# Altium PCB HyperDrive.PcbDoc (part 2 of 2)
Units mm, origin at the board's own origin, x right, y up, seen from the top; angles counter-clockwise.
Board outline 100 x 100 mm, 8 copper layers (SU, GNDU, HSU, PWRU, PWRD, HSD, GNDD, SD), stack 0.757 mm thick; 201 components, 155 nets, 1129 pads, 0 vias.
Unrouted connection lines stored in the file: 714.
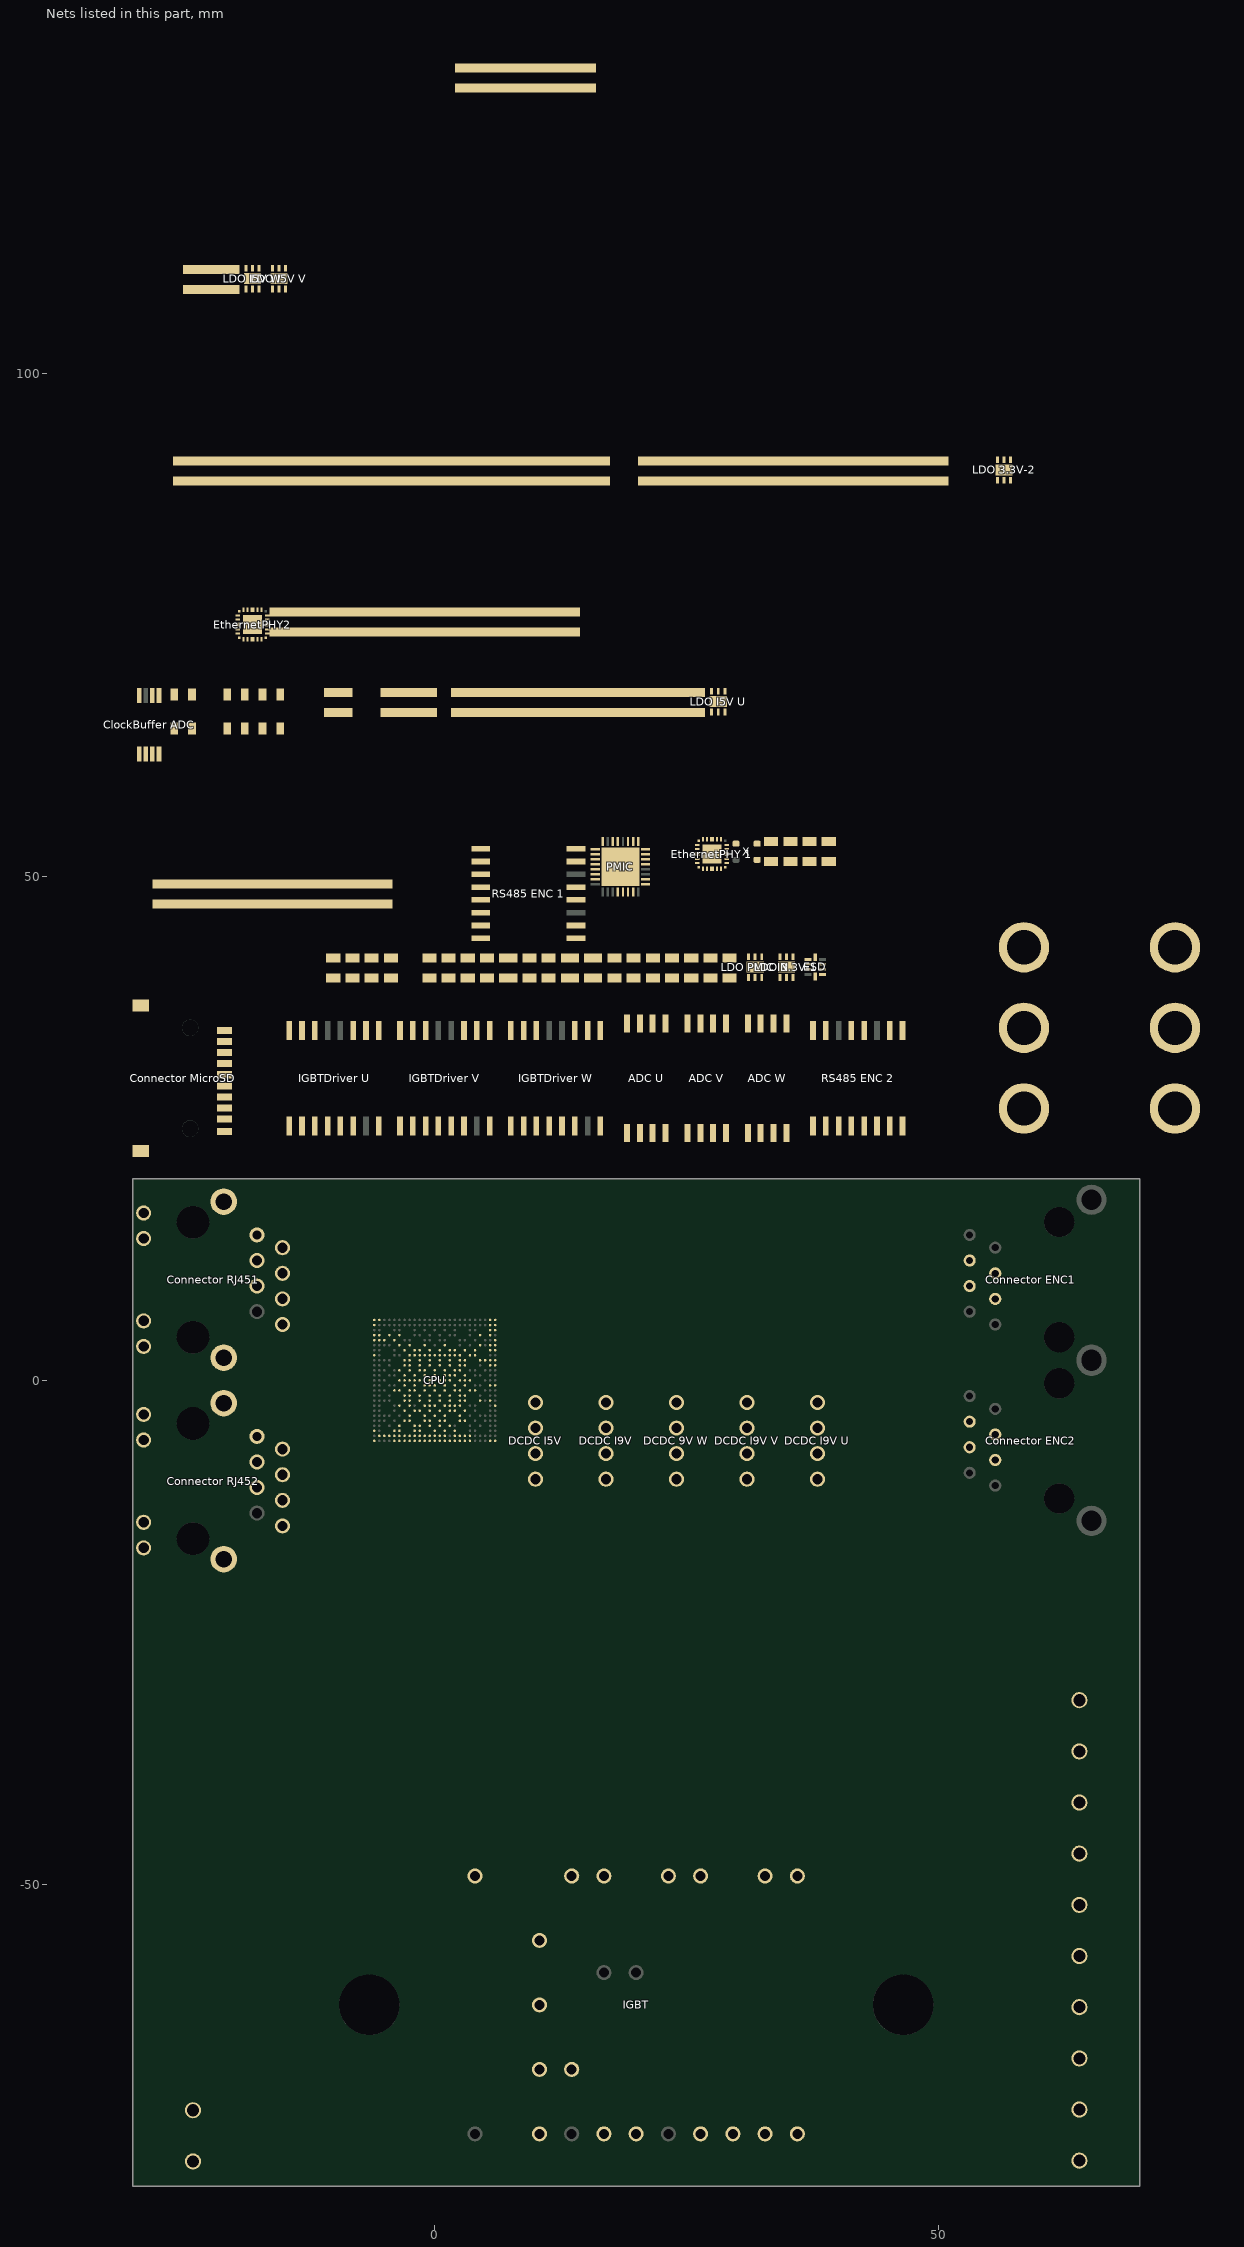
[diagram p2: the nets of this part, all layers, seen from the top]

## Part data
"ADC U" "ADC V" "ADC W": "Isolated Delta-Sigm", MANUFACTURER_NAME="Texas Instruments", MANUFACTURER_PART_NUMBER=AMC1306M05DWV, Copyright="Copyright (C) 2025 Ultra Librarian. All rights reserved.", Datasheet=https://www.ti.com/lit/gpn/amc1306m05, RefDes=RefDes, Type=TYPE
"C 1.8V Crystal" "C ADC U-1" "C ADC U-2" "C ADC U-3" "C ADC U-4" "C ADC V-1" "C ADC V-2" "C ADC V-3" "C ADC V-4" "C ADC W-1" "C ADC W-2" "C ADC W-3" "C ADC W-4" "C Backup-1" "C Backup-2" "C Backup-3" "C Backup-4" "C Backup-5" "C Backup-6" "C CAP_SOC MCU" "C CAP_SOC VDDS0" "C CAP_SOC VDDS1" "C CAP_SOC VDDS2" "C CAP_SOC VDDS3" "C CAP_SOC VDDS4" "C CAP_SOC VDDS5" "C CAP_SOC VDDS6" "C CAP_SOC VDDS_CANUART" "C ClockBuffer-1" "C ClockBuffer-2" "C DCDC I5V IN" "C DCDC I5V OUT" "C DCDC I9V IN" "C DCDC I9V OUT" "C DCDC I9V U IN" "C DCDC I9V V IN" "C DCDC I9V V OUT" "C DCDC I9V W IN" "C DCDC I9V W OUT" "C DCDCI 9V U OUT" "C Driver UH" "C Driver UL" "C Driver VH" "C Driver VL" "C Driver WH" "C Driver WL" "C DriverU-1" "C DriverU-2" "C DriverV-1" "C DriverV-2" "C DriverW-1" "C DriverW-2" "C ENC1 VCC1" "C ENC1 VCC2-1" "C ENC1 VCC2-2" "C ENC2 VCC1" "C ENC2 VCC2-1" "C ENC2 VCC2-2" "C EthernetPHY1-1" "C EthernetPHY1-2" "C EthernetPHY1-3" "C EthernetPHY2-1" "C EthernetPHY2-2" "C EthernetPHY2-3" "C LDO 3.3V-1 IN" "C LDO 3.3V-1 OUT" "C LDO 3.3V-2 IN" "C LDO 3.3V-2 OUT" "C LDO I9V U IN" "C LDO I9V U OUT" "C LDO I9V V IN" "C LDO I9V V OUT" "C LDO I9V W IN" "C LDO I9V W OUT" "C LDO PMIC IN" "C LDO PMIC OUT" "C MMC-1" "C MMC-2" "C PMIC 0.75V" "C PMIC 1.1V" "C PMIC 1.8V" "C PMIC 1.8V*" "C PMIC 2.5V" "C PMIC InternalBypass" "C PMIC SD_VDD" "C PMIC VIN B1" "C PMIC VIN B2" "C PMIC VIN B3" "C PMIC VIN LDO1" "C PMIC VIN LDO34" "C RJ451 RD1" "C RJ451 RD2" "C RJ451 TD1" "C RJ451 TD2" "C RJ452 RD1" "C RJ452 RD2" "C RJ452 TD1" "C RJ452 TD2": library part Capacitor, "Capacitor"
"ClockBuffer ADC": "Clock Buffer", Mfr_Name="Texas Instruments", RefDes=RefDes, Type=TYPE
"Connector 5V Main" "Connector AC UV" "Connector AC WN" "Connector HVDC" "Connector MOTOR UV" "Connector MOTOR WE": "Terminal Screw 5.08mm", Package=SCREWTERMINAL1X2, DeviceSetName=TERMINALBLOCK-1X2, GateName_1=G$1, LibraryName=TOTUDU, SymbolName_1=TERMINALBLOCK1X2
"Connector ENC1" "Connector ENC2": "8P8C Generic Robu.in RoboticsDNA", Package=RJ45-NOSHIELD, DeviceName=NOSHIELD, DeviceSetName=RJ45, GateName_1=JP1, LibraryName=TOTUDU, SymbolName_1=RJ45
"Connector MicroSD": "MicroSD Slot"
"Connector RJ451" "Connector RJ452": "RJ45 With Magnetics 10/100Mbps"
CPU: "Quad Core A53 512MB RAM"
"D GateOFF UH" "D GateOFF UL" "D GateOFF VH" "D GateOFF VL" "D GateOFF WH" "D GateOFF WL": library part Diode
ESD: library part "ESD TPD6E001RSFR", "ESD 6Channel", Mfr_Name="Texas Instruments", RefDes=RefDes, Type=Type
"EthernetPHY1 PWRDWN" "R DDR0_CAL0" "R DDR_RESET" "R DDRZQ" "R EthernetPHY1 LED Act" "R EthernetPHY1 LED Link" "R EthernetPHY2 LED Act" "R EthernetPHY2 LED Link" "R EthernetPHY2 PWRDN" "R GATE PullDown UH" "R GATE PullDown UL" "R GATE PullDown VH" "R GATE PullDown VL" "R GATE PullDown WH" "R GATE PullDown WL" "R GateOFF UH" "R GateOFF UL" "R GateOFF VH" "R GateOFF VL" "R GateOFF WH" "R GateOFF WL" "R GateON UH" "R GateON UL" "R GateON VH" "R GateON VL" "R GateON WH" "R GateON WL" "R MCU_PORZ" "R MCU_RESETZ" "R MMC PULLUP CLK" "R MMC PULLUP CMD" "R MMC PULLUP D0" "R MMC PULLUP D1" "R MMC PULLUP D2" "R MMC PULLUP D3" "R PMIC Enable Pullup" "R PORZ_OUT" "R RBIAS EthernetPHY1" "R RBIAS EthernetPHY2" "R RESET_REQZ" "R RESETSTATZ": library part Resistor, "Resistor"
EthernetPHY2 "EthernetPHY 1": "PHY 10/100 Mbps", MANUFACTURER_NAME="Texas Instruments", MANUFACTURER_PART_NUMBER=DP83825IRMQR, Copyright="Copyright (C) 2025 Ultra Librarian. All rights reserved.", Datasheet=https://www.ti.com/lit/gpn/dp83825i, RefDes=RefDes, Type=Type
"F ADC" "F Driver" "F ENC1 VCC1" "F ENC1 VCC2" "F ENC2 VCC1" "F ENC2 VCC2" "F EthernetPHY1" "F EthernetPHY?": library part Ferrite, "Ferrite"
IGBT: library part "IGBT FP30R06W1E3", "IGBT FP30R06W1E3"
"IGBTDriver U" "IGBTDriver V" "IGBTDriver W": library part "IGBTDriver UCC21550ADWR", "Isolated Half Bridge Driver", MANUFACTURER_NAME="Texas Instruments", MANUFACTURER_PART_NUMBER=UCC21550ADWR, Copyright="Copyright (C) 2025 Ultra Librarian. All rights reserved.", Datasheet=https://www.ti.com/lit/gpn/ucc21550, RefDes=RefDes, Type="Power Management"
"L PMIC Buck1" "L PMIC Buck2" "L PMIC Buck3": library part Inductor, "Inductor"
"LDO 3.3V-1" "LDO 3.3V-2" "LDO I5V U" "LDO I5V V" "LDO I5V W" "LDO PMIC IN": "LDO 1A", MANUFACTURER_NAME="Texas Instruments", MANUFACTURER_PART_NUMBER=TLV76701DRVR, Copyright="Copyright (C) 2025 Ultra Librarian. All rights reserved.", Datasheet=https://www.ti.com/lit/gpn/tlv767, RefDes=RefDes, Type=TYPE
"LED 12V": library part LED, "LED"
PMIC: library part "PMIC TPS6521901RHBR", "AM625 SIP PMIC", MANUFACTURER_NAME="Texas Instruments", Copyright="Copyright (C) 2025 Ultra Librarian. All rights reserved.", MANUFACTURER_PART_NUMBER=PTPS6521901RHBR, RefDes=RefDes, Type=TYPE
"RS485 ENC 1" "RS485 ENC 2": "RS485 Isolated TransReciever", MANUFACTURER_NAME="Texas Instruments", MANUFACTURER_PART_NUMBER=ISO3088DW, Copyright="Copyright (C) 2025 Ultra Librarian. All rights reserved.", Datasheet=https://www.ti.com/lit/gpn/iso3088, RefDes=RefDes, Type=Type
"Shunt U" "Shunt V" "Shunt W": "Resistor"
X: MANUFACTURER_NAME=ECS, MANUFACTURER_PART_NUMBER=ECS-2520MV-250-CN-TR, Mouser Part Number=520-2520MV-250-CN-T, Datasheet Link=https://www.arrow.com/en/products/ecs-2520mv-250-cn-tr/ecs-international, Geometry.Height=0.9mm, Mouser Price/Stock=https://www.mouser.co.uk/ProductDetail/ECS/ECS-2520MV-250-CN-TR?qs=fAHHVMwC%252BbiTva9uv8VI%2Fw%3D%3D

## Nets (pads, with @x,y where several pads share a name; then routed paths per layer and width w, separated by ;. In a path a pad name is that pad's centre, name@x,y a point inside that pad or via, vN(x,y) a via of type N, cw(c..) or ccw(c..) an arc to the next point about the centre after c; other vN are vias at no path point)
"0.75Vb Inductor": "L PMIC Buck1.1" PMIC.2 PMIC.3
0.85V: "C PMIC 0.75V.2" "L PMIC Buck1.2" CPU.F8 CPU.H8 CPU.J11 CPU.J12 CPU.J14 CPU.K16 CPU.K17 CPU.L12 CPU.L15 CPU.M16 CPU.N8 CPU.N11 CPU.N12 CPU.N13 CPU.N14 CPU.P16 CPU.P17 CPU.R11 CPU.R12 CPU.R14 CPU.T10 CPU.U12 CPU.U14 CPU.V8 CPU.V15 CPU.V17 CPU.W12 CPU.W13 PMIC.1
1.1V: "C PMIC 1.1V.2" "L PMIC Buck3.2" CPU.F2 CPU.G2 CPU.H1 CPU.H2 CPU.K9 CPU.L8 CPU.M9 CPU.N1 CPU.N2 CPU.P2 CPU.P9 CPU.R2 CPU.R8 CPU.U1 CPU.U2 CPU.V2 CPU.W2 PMIC.24
"1.1Vb Inductor": "L PMIC Buck3.1" PMIC.27
1.8V: "C PMIC 1.8V.2" "L PMIC Buck2.2" CPU.G10 PMIC.32
"1.8V ClockGenerator": "C 1.8V Crystal.2" "F 1.8V Crystal.2" X.4
1.8VA: "C PMIC 1.8V*.2" "F 1.8V Crystal.1" CPU.G7 CPU.G16 CPU.L11 CPU.L14 CPU.M4 CPU.N3 CPU.T9 CPU.U11 CPU.U15 CPU.W9 CPU.W10 CPU.W14 CPU.Y11 PMIC.21
"1.8Vb Inductor": "L PMIC Buck2.1" PMIC.29
2.5V: "C PMIC 2.5V.2" PMIC.23
3.3V: "EthernetPHY1 PWRDWN.1" "R EthernetPHY2 PWRDN.1" "R MCU_RESETZ.2" "R RESET_REQZ.2" CPU.F11 CPU.F15 CPU.G12 CPU.G14 CPU.H9 CPU.J18 CPU.K10 CPU.L18 CPU.M19 CPU.N18 CPU.P18 CPU.T7 CPU.T19 CPU.U18 CPU.W16 CPU.W19 CPU.Y13
"3.3V ENC1": "C ENC1 VCC1.1" "F ENC1 VCC1.2" "RS485 ENC 1.1"
"3.3V ENC2": "C ENC2 VCC1.1" "F ENC2 VCC1.2" "RS485 ENC 2.1"
"3.3V EthernetPHY1": "C EthernetPHY1-1.2" "C EthernetPHY1-2.1" "C EthernetPHY1-3.1" "EthernetPHY 1.6" "EthernetPHY 1.19" "F EthernetPHY1.2"
"3.3V EthernetPHY2": "C EthernetPHY2-1.1" "C EthernetPHY2-2.1" "C EthernetPHY2-3.1" "F EthernetPHY2.2" EthernetPHY2.6 EthernetPHY2.19
"3.3V MMC": "C MMC-1.2" "C MMC-2.2" "Connector MicroSD.4" "F EthernetPHY?.2"
3.3V-1: "C LDO 3.3V-1 OUT.2" "F EthernetPHY1.1" "F EthernetPHY2.1" "LDO 3.3V-1.1" "LDO 3.3V-1.2"
3.3V-2: "C LDO 3.3V-2 OUT.2" "F ADC.1" "F Driver.1" "F ENC1 VCC1.1" "F ENC2 VCC1.1" "F EthernetPHY?.1" "LDO 3.3V-2.1" "LDO 3.3V-2.2"
"3.3V-2 ADC": "ADC U.8" "ADC V.8" "ADC W.8" "C ADC U-1.1" "C ADC U-2.1" "C ADC V-1.1" "C ADC V-2.1" "C ADC W-1.1" "C ADC W-2.1" "C ClockBuffer-1.2" "C ClockBuffer-2.2" "ClockBuffer ADC.2" "ClockBuffer ADC.6" "F ADC.2"
"3.3V-2 Driver": "C DriverU-1.2" "C DriverU-2.2" "C DriverV-1.2" "C DriverV-2.2" "C DriverW-1.2" "C DriverW-2.2" "F Driver.2" "IGBTDriver U.3" "IGBTDriver U.8" "IGBTDriver V.3" "IGBTDriver V.8" "IGBTDriver W.3" "IGBTDriver W.8"
5V: "C Backup-1.2" "C Backup-2.2" "C Backup-3.2" "C Backup-4.2" "C Backup-5.2" "C Backup-6.2" "C DCDC I5V IN.2" "C DCDC I9V IN.2" "C DCDC I9V U IN.2" "C DCDC I9V V IN.2" "C DCDC I9V W IN.2" "C LDO 3.3V-1 IN.2" "C LDO 3.3V-2 IN.2" "C LDO PMIC IN.2" "C PMIC VIN B1.2" "C PMIC VIN B2.2" "C PMIC VIN B3.2" "Connector 5V Main.1" "DCDC 9V W.VIN+" "DCDC I5V.VIN+" "DCDC I9V U.VIN+" "DCDC I9V V.VIN+" "DCDC I9V.VIN+" "LDO 3.3V-1.6" "LDO 3.3V-2.6" "LDO PMIC IN.4" "LDO PMIC IN.6" "LED 12V.1" "R PMIC Enable Pullup.2" PMIC.4 PMIC.5 PMIC.13 PMIC.26 PMIC.30
25Mhz: CPU.B2 X.3
50Mhz: "EthernetPHY 1.13" CPU.A18 CPU.AD17 CPU.AD23 EthernetPHY2.13
"AC U": "Connector AC UV.1" IGBT.L1
"AC V": "Connector AC UV.2" IGBT.L2
"AC W": "Connector AC WN.1" IGBT.L3
"CAP_SOC CANUART": "C CAP_SOC VDDS_CANUART.1" CPU.G9
"CAP_SOC MCU": "C CAP_SOC MCU.1" CPU.H11
"CAP_SOC VDDS0": "C CAP_SOC VDDS0.1" CPU.H15
"CAP_SOC VDDS1": "C CAP_SOC VDDS1.1" CPU.K18
"CAP_SOC VDDS2": "C CAP_SOC VDDS2.1" CPU.W17
"CAP_SOC VDDS3": "C CAP_SOC VDDS3.1" CPU.P19
"CAP_SOC VDDS4": "C CAP_SOC VDDS4.1" CPU.U7
"CAP_SOC VDDS5": "C CAP_SOC VDDS5.1" CPU.H17
"CAP_SOC VDDS6": "C CAP_SOC VDDS6.1" CPU.J19
CardDetect: "Connector MicroSD.9"
DDR0_CAL: "R DDR0_CAL0.1" CPU.M2
DDR0_RESETN: "R DDR_RESET.1" CPU.G1
DDR_ZQ: "R DDRZQ.1" CPU.R3
"DeltaSigma Clock Input": "ClockBuffer ADC.1"
"DeltaSigma Clock U": "ADC U.7" "ClockBuffer ADC.3"
"DeltaSigma Clock V": "ADC V.7" "ClockBuffer ADC.8"
"DeltaSigma Clock W": "ADC W.7" "ClockBuffer ADC.5"
"DeltaSigma Data U": "ADC U.6"
"DeltaSigma Data V": "ADC V.6"
"DeltaSigma Data W": "ADC W.6"
"Drive Enable": "IGBTDriver U.5" "IGBTDriver V.5" "IGBTDriver W.5"
EARTH: "Connector AC WN.2" "Connector MOTOR WE.2" "Connector RJ451.8" "Connector RJ451.SH" "Connector RJ452.8" "Connector RJ452.SH"
"ENC1 A": "Connector ENC1.5" "RS485 ENC 1.13"
"ENC1 B": "Connector ENC1.4" "RS485 ENC 1.12"
"ENC1 FL": "RS485 ENC 1.4" "RS485 ENC 1.5"
"ENC1 RX": "RS485 ENC 1.3"
"ENC1 TX": "RS485 ENC 1.6"
"ENC2 A": "Connector ENC2.5" "RS485 ENC 2.13"
"ENC2 B": "Connector ENC2.4" "RS485 ENC 2.12"
"ENC2 FL": "RS485 ENC 2.4" "RS485 ENC 2.5"
"ENC2 RX": "RS485 ENC 2.3"
"ENC2 TX": "RS485 ENC 2.6"
"Ethernet1 RD+": "Connector RJ451.3" "EthernetPHY 1.8"
"Ethernet1 RD-": "Connector RJ451.6" "EthernetPHY 1.7"
"Ethernet1 TD+": "Connector RJ451.1" "EthernetPHY 1.11"
"Ethernet1 TD-": "Connector RJ451.2" "EthernetPHY 1.10"
"Ethernet2 RD+": "Connector RJ452.3" EthernetPHY2.8
"Ethernet2 RD-": "Connector RJ452.6" EthernetPHY2.7
"Ethernet2 TD+": "Connector RJ452.1" EthernetPHY2.11
"Ethernet2 TD-": "Connector RJ452.2" EthernetPHY2.10
"EthernetPHY1 LED Act": "EthernetPHY 1.4" "R EthernetPHY1 LED Act.2"
"EthernetPHY1 LED Link": "EthernetPHY 1.2" "R EthernetPHY1 LED Link.2"
"EthernetPHY1 PWRDN": "EthernetPHY1 PWRDWN.2" "EthernetPHY 1.3"
"EthernetPHY1 RBIAS": "EthernetPHY 1.14" "R RBIAS EthernetPHY1.1"
"EthernetPHY2 LED Act": "R EthernetPHY2 LED Act.2" EthernetPHY2.4
"EthernetPHY2 LED Link": "R EthernetPHY2 LED Link.2" EthernetPHY2.2
"EthernetPHY2 PWRDN": "R EthernetPHY2 PWRDN.2" EthernetPHY2.3
"EthernetPHY2 RBIAS": "R RBIAS EthernetPHY2.1" EthernetPHY2.14
"Gate UH": "IGBTDriver U.15" "R GateOFF UH.2" "R GateON UH.2"
"Gate UL": "IGBTDriver U.10" "R GateOFF UL.2" "R GateON UL.2"
"Gate VH": "IGBTDriver V.15" "R GateOFF VH.2" "R GateON VH.2"
"Gate VL": "IGBTDriver V.10" "R GateOFF VL.2" "R GateON VL.2"
"Gate WH": "IGBTDriver W.15" "R GateOFF WH.2" "R GateON WH.2"
"Gate WL": "IGBTDriver W.10" "R GateOFF WL.2" "R GateON WL.2"
"GateOFF UH": "D GateOFF UH.1" "R GateOFF UH.1"
"GateOFF UL": "D GateOFF UL.1" "R GateOFF UL.1"
"GateOFF VH": "D GateOFF VH.1" "R GateOFF VH.1"
"GateOFF VL": "D GateOFF VL.1" "R GateOFF VL.1"
"GateOFF WH": "D GateOFF WH.1" "R GateOFF WH.1"
"GateOFF WL": "D GateOFF WL.1" "R GateOFF WL.1"
GND: "ADC U.5" "ADC V.5" "ADC W.5" "C 1.8V Crystal.1" "C ADC U-1.2" "C ADC U-2.2" "C ADC V-1.2" "C ADC V-2.2" "C ADC W-1.2" "C ADC W-2.2" "C Backup-1.1" "C Backup-2.1" "C Backup-3.1" "C Backup-4.1" "C Backup-5.1" "C Backup-6.1" "C CAP_SOC MCU.2" "C CAP_SOC VDDS0.2" "C CAP_SOC VDDS1.2" "C CAP_SOC VDDS2.2" "C CAP_SOC VDDS3.2" "C CAP_SOC VDDS4.2" "C CAP_SOC VDDS5.2" "C CAP_SOC VDDS6.2" "C CAP_SOC VDDS_CANUART.2" "C ClockBuffer-1.1" "C ClockBuffer-2.1" "C DCDC I5V IN.1" "C DCDC I9V IN.1" "C DCDC I9V U IN.1" "C DCDC I9V V IN.1" "C DCDC I9V W IN.1" "C DriverU-1.1" "C DriverU-2.1" "C DriverV-1.1" "C DriverV-2.1" "C DriverW-1.1" "C DriverW-2.1" "C ENC1 VCC1.2" "C ENC2 VCC1.2" "C EthernetPHY1-1.1" "C EthernetPHY1-2.2" "C EthernetPHY1-3.2" "C EthernetPHY2-1.2" "C EthernetPHY2-2.2" "C EthernetPHY2-3.2" "C LDO 3.3V-1 IN.1" "C LDO 3.3V-1 OUT.1" "C LDO 3.3V-2 IN.1" "C LDO 3.3V-2 OUT.1" "C LDO PMIC IN.1" "C LDO PMIC OUT.1" "C MMC-1.1" "C MMC-2.1" "C PMIC 0.75V.1" "C PMIC 1.1V.1" "C PMIC 1.8V*.1" "C PMIC 1.8V.1" "C PMIC 2.5V.1" "C PMIC InternalBypass.1" "C PMIC SD_VDD.1" "C PMIC VIN B1.1" "C PMIC VIN B2.1" "C PMIC VIN B3.1" "C PMIC VIN LDO1.1" "C PMIC VIN LDO34.1" "C RJ451 RD1.1" "C RJ451 RD2.1" "C RJ451 TD1.1" "C RJ451 TD2.1" "C RJ452 RD1.1" "C RJ452 RD2.1" "C RJ452 TD1.1" "C RJ452 TD2.1" "ClockBuffer ADC.4" "Connector 5V Main.2" "Connector MicroSD.6" "Connector MicroSD.10" "Connector MicroSD.SH" "Connector RJ451.10" "Connector RJ451.11" "Connector RJ452.10" "Connector RJ452.11" "DCDC 9V W.VIN-" "DCDC I5V.VIN-" "DCDC I9V U.VIN-" "DCDC I9V V.VIN-" "DCDC I9V.VIN-" "EthernetPHY 1.9" "EthernetPHY 1.21" "EthernetPHY 1.25" "IGBTDriver U.4" "IGBTDriver U.6" "IGBTDriver V.4" "IGBTDriver V.6" "IGBTDriver W.4" "IGBTDriver W.6" "LDO 3.3V-1.3" "LDO 3.3V-1.5" "LDO 3.3V-1.7" "LDO 3.3V-2.3" "LDO 3.3V-2.5" "LDO 3.3V-2.7" "LDO PMIC IN.3" "LDO PMIC IN.5" "LDO PMIC IN.7" "R 12V LED.1" "R DDR0_CAL0.2" "R DDR_RESET.2" "R DDRZQ.2" "R MCU_PORZ.2" "R PORZ_OUT.2" "R RBIAS EthernetPHY1.2" "R RBIAS EthernetPHY2.2" "R RESETSTATZ.2" "RS485 ENC 1.2" "RS485 ENC 1.7" "RS485 ENC 1.8" "RS485 ENC 2.2" "RS485 ENC 2.7" "RS485 ENC 2.8" CPU.A1 CPU.A3 CPU.A24 CPU.A25 CPU.AA11 CPU.AB9 CPU.AD1 CPU.AD9 CPU.AD12 CPU.AD16 CPU.AD25 CPU.AE1 CPU.AE8 CPU.AE12 CPU.AE16 CPU.AE24 CPU.AE25 CPU.B25 CPU.C2 CPU.E1 CPU.E2 CPU.E3 CPU.F1 CPU.F3 CPU.F4 CPU.F13 CPU.G5 CPU.G13 CPU.G19 CPU.H5 CPU.H6 CPU.H10 CPU.H13 CPU.H16 CPU.H18 CPU.H20 CPU.J1 CPU.J2 CPU.J3 CPU.J4 CPU.J7 CPU.J13 CPU.K1 CPU.K2 CPU.K3 CPU.K4 CPU.K7 CPU.K13 CPU.K15 CPU.K19 CPU.L1 CPU.L2 CPU.L5 CPU.L6 CPU.L20 CPU.M1 CPU.M5 CPU.M7 CPU.M8 CPU.M10 CPU.M12 CPU.M13 CPU.M17 CPU.M18 CPU.N6 CPU.N15 CPU.P1 CPU.P4 CPU.P5 CPU.P7 CPU.P10 CPU.P13 CPU.R1 CPU.R5 CPU.R6 CPU.R13 CPU.R15 CPU.R18 CPU.R20 CPU.T1 CPU.T4 CPU.T8 CPU.T13 CPU.T14 CPU.T16 CPU.T17 CPU.T18 CPU.U3 CPU.U8 CPU.U19 CPU.V1 CPU.V5 CPU.V6 CPU.V9 CPU.V10 CPU.V11 CPU.V13 CPU.V16 CPU.V18 CPU.W1 CPU.W5 CPU.W7 CPU.Y1 CPU.Y2 ESD.GND EthernetPHY2.9 EthernetPHY2.21 EthernetPHY2.25 PMIC.15 PMIC.33 X.2
HVDC: "Connector HVDC.1" IGBT.P IGBT.P1
I5V: "C DCDC I5V OUT.2" "DCDC I5V.VOUT+" "F ENC1 VCC2.1" "F ENC2 VCC2.1"
"I5V ENC1": "C ENC1 VCC2-1.1" "C ENC1 VCC2-2.1" "Connector ENC1.3" "F ENC1 VCC2.2" "RS485 ENC 1.16"
"I5V ENC2": "C ENC2 VCC2-1.2" "C ENC2 VCC2-2.2" "Connector ENC2.3" "F ENC2 VCC2.2" "RS485 ENC 2.16"
"I5V U": "ADC U.1" "C ADC U-3.2" "C ADC U-4.2" "C LDO I9V U OUT.2" "LDO I5V U.1" "LDO I5V U.2"
"I5V V": "ADC V.1" "C ADC V-3.2" "C ADC V-4.2" "C LDO I9V V OUT.2" "LDO I5V V.1" "LDO I5V V.2"
"I5V W": "ADC W.1" "C ADC W-3.2" "C ADC W-4.2" "C LDO I9V W OUT.2" "LDO I5V W.1" "LDO I5V W.2"
I9V: "C DCDC I9V OUT.2" "C Driver UL.2" "C Driver VL.2" "C Driver WL.2" "DCDC I9V.VOUT+" "IGBTDriver U.11" "IGBTDriver V.11" "IGBTDriver W.11"
"I9V U": "C DCDCI 9V U OUT.2" "C Driver UH.1" "C LDO I9V U IN.2" "C LDO I9V V IN.2" "C LDO I9V W IN.2" "DCDC I9V U.VOUT+" "IGBTDriver U.16" "LDO I5V U.4" "LDO I5V U.6" "LDO I5V V.4" "LDO I5V V.6" "LDO I5V W.4" "LDO I5V W.6"
"I9V V": "C DCDC I9V V OUT.2" "C Driver VH.1" "DCDC I9V V.VOUT+" "IGBTDriver V.16"
"I9V W": "C DCDC I9V W OUT.2" "C Driver WH.1" "DCDC 9V W.VOUT+" "IGBTDriver W.16"
"IGBT Motor U": "ADC U.2" "C Driver UH.2" "IGBTDriver U.14" "R GATE PullDown UH.2" "Shunt U.1" IGBT.U
"IGBT Motor V": "ADC V.2" "C Driver VH.2" "IGBTDriver V.14" "R GATE PullDown VH.2" "Shunt V.1" IGBT.V
"IGBT Motor W": "ADC W.2" "C Driver WH.2" "IGBTDriver W.14" "R GATE PullDown WH.2" "Shunt W.1" IGBT.W
"IGBT UH": "IGBTDriver U.1"
"IGBT UL": "IGBTDriver U.2"
"IGBT VH": "IGBTDriver V.1"
"IGBT VL": "IGBTDriver V.2"
"IGBT WH": "IGBTDriver W.1"
"IGBT WL": "IGBTDriver W.2"
IGND: "C DCDC I5V OUT.1" "C DCDC I9V OUT.1" "C Driver UL.1" "C Driver VL.1" "C Driver WL.1" "C ENC1 VCC2-1.2" "C ENC1 VCC2-2.2" "C ENC2 VCC2-1.1" "C ENC2 VCC2-2.1" "Connector ENC1.6" "Connector ENC2.6" "Connector HVDC.2" "DCDC I5V.VOUT-" "DCDC I9V.VOUT-" "IGBTDriver U.9" "IGBTDriver V.9" "IGBTDriver W.9" "R GATE PullDown UL.2" "R GATE PullDown VL.2" "R GATE PullDown WL.2" "RS485 ENC 1.9" "RS485 ENC 1.10" "RS485 ENC 1.15" "RS485 ENC 2.9" "RS485 ENC 2.10" "RS485 ENC 2.15" IGBT.EU IGBT.EV IGBT.N IGBT.NB
"LED 5V": "LED 12V.2" "R 12V LED.2"
MCU_RESETZ: "R MCU_RESETZ.1" CPU.E11
MDC: "EthernetPHY 1.16" CPU.AD24 EthernetPHY2.16
MDIO: "EthernetPHY 1.15" CPU.AB22 EthernetPHY2.15
MMC_CLK: "Connector MicroSD.3" "R MMC PULLUP CMD.2" CPU.B22 ESD.1
MMC_CMD: "Connector MicroSD.5" "R MMC PULLUP CLK.2" CPU.A21 ESD.2
MMC_D0: "Connector MicroSD.7" "R MMC PULLUP D0.2" CPU.A22 ESD.3
MMC_D1: "Connector MicroSD.8" "R MMC PULLUP D1.2" CPU.B21 ESD.4
MMC_D2: "Connector MicroSD.1" "R MMC PULLUP D2.2" CPU.C21 ESD.5
MMC_D3: "Connector MicroSD.2" "R MMC PULLUP D3.2" CPU.D22 ESD.6
"Motor U": "ADC U.3" "ADC U.4" "C ADC U-3.1" "C ADC U-4.1" "C DCDCI 9V U OUT.1" "C LDO I9V U IN.1" "C LDO I9V U OUT.1" "Connector MOTOR UV.1" "DCDC I9V U.VOUT-" "LDO I5V U.3" "LDO I5V U.5" "LDO I5V U.7" "Shunt U.2"
"Motor V": "ADC V.3" "ADC V.4" "C ADC V-3.1" "C ADC V-4.1" "C DCDC I9V V OUT.1" "C LDO I9V V IN.1" "C LDO I9V V OUT.1" "Connector MOTOR UV.2" "DCDC I9V V.VOUT-" "LDO I5V V.3" "LDO I5V V.5" "LDO I5V V.7" "Shunt V.2"
"Motor W": "ADC W.3" "ADC W.4" "C ADC W-3.1" "C ADC W-4.1" "C DCDC I9V W OUT.1" "C LDO I9V W IN.1" "C LDO I9V W OUT.1" "Connector MOTOR WE.1" "DCDC 9V W.VOUT-" "LDO I5V W.3" "LDO I5V W.5" "LDO I5V W.7" "Shunt W.2"
"NetC RJ451 RD1_2": "C RJ451 RD1.2" "C RJ451 RD2.2" "Connector RJ451.5"
"NetC RJ451 TD1_2": "C RJ451 TD1.2" "C RJ451 TD2.2" "Connector RJ451.4"
"NetC RJ452 RD1_2": "C RJ452 RD1.2" "C RJ452 RD2.2" "Connector RJ452.5"
"NetC RJ452 TD1_2": "C RJ452 TD1.2" "C RJ452 TD2.2" "Connector RJ452.4"
"PMIC 3.3V Enable": "LDO 3.3V-1.4" "LDO 3.3V-2.4" PMIC.17
"PMIC 3.3V PVIN_LDO": "C LDO PMIC OUT.2" "C PMIC VIN LDO1.2" "C PMIC VIN LDO34.2" "LDO PMIC IN.1" "LDO PMIC IN.2" PMIC.6 PMIC.22
"PMIC Enable": "R PMIC Enable Pullup.1" PMIC.25
"PMIC Good": "EthernetPHY 1.5" "R MCU_PORZ.1" CPU.D2 EthernetPHY2.5 PMIC.18
"PMIC SD VSEL": PMIC.12
"PMIC VDD1P8": "C PMIC InternalBypass.2" PMIC.14
PORZ_OUT: "R PORZ_OUT.1" CPU.E21
RESETSTATZ: "R RESETSTATZ.1" CPU.F22
"RJ451 LED_G+": "Connector RJ451.9" "R EthernetPHY1 LED Link.1"
"RJ451 LED_Y+": "Connector RJ451.12" "Connector RJ452.12" "R EthernetPHY1 LED Act.1" "R EthernetPHY2 LED Act.1"
"RJ452 LED_G+": "Connector RJ452.9" "R EthernetPHY2 LED Link.1"
"RMII1 CRS_DV": "EthernetPHY 1.20" CPU.AE19
"RMII1 RX_D0": "EthernetPHY 1.18" CPU.AB17
"RMII1 RX_D1": "EthernetPHY 1.17" "EthernetPHY 1.24" CPU.AC17 CPU.AD20
"RMII1 RX_ER": "EthernetPHY 1.22" CPU.AE17
"RMII1 TX_D0": "EthernetPHY 1.23" CPU.AE20
"RMII1 TX_EN": "EthernetPHY 1.1" CPU.AD19
"RMII2 CRS_DV": CPU.AE21 EthernetPHY2.20
"RMII2 RX_D0": CPU.AE23 EthernetPHY2.18
"RMII2 RX_D1": CPU.AA18 CPU.AB20 EthernetPHY2.17 EthernetPHY2.24
"RMII2 RX_ER": CPU.AD22 EthernetPHY2.22
"RMII2 TX_D0": CPU.Y18 EthernetPHY2.23
"RMII2 TX_EN": CPU.AA19 EthernetPHY2.1
"SD VDD": "C PMIC SD_VDD.2" "R MMC PULLUP CLK.1" "R MMC PULLUP CMD.1" "R MMC PULLUP D0.1" "R MMC PULLUP D1.1" "R MMC PULLUP D2.1" "R MMC PULLUP D3.1" CPU.G17 ESD.VCC PMIC.7
UH: "D GateOFF UH.2" "R GATE PullDown UH.1" "R GateON UH.1" IGBT.G1
UL: "D GateOFF UL.2" "R GATE PullDown UL.1" "R GateON UL.1" IGBT.G2
VH: "D GateOFF VH.2" "R GATE PullDown VH.1" "R GateON VH.1" IGBT.G3
VL: "D GateOFF VL.2" "R GATE PullDown VL.1" "R GateON VL.1" IGBT.G4
"Warm Reset": "R RESET_REQZ.1" CPU.F20
WH: "D GateOFF WH.2" "R GATE PullDown WH.1" "R GateON WH.1" IGBT.G5
WL: "D GateOFF WL.2" "R GATE PullDown WL.1" "R GateON WL.1" IGBT.G6
pads on no net: "ClockBuffer ADC.7" "Connector ENC1.1" "Connector ENC1.2" "Connector ENC1.7" "Connector ENC1.8" "Connector ENC1.MH1" "Connector ENC1.MH2" "Connector ENC1.SHIELDL" "Connector ENC1.SHIELDR" "Connector ENC2.1" "Connector ENC2.2" "Connector ENC2.7" "Connector ENC2.8" "Connector ENC2.MH1" "Connector ENC2.MH2" "Connector ENC2.SHIELDL" "Connector ENC2.SHIELDR" "Connector MicroSD." "Connector RJ451.7" "Connector RJ451." "Connector RJ452.7" "Connector RJ452." "EthernetPHY 1.12" "IGBTDriver U.7" "IGBTDriver U.12" "IGBTDriver U.13" "IGBTDriver V.7" "IGBTDriver V.12" "IGBTDriver V.13" "IGBTDriver W.7" "IGBTDriver W.12" "IGBTDriver W.13" "RS485 ENC 1.11" "RS485 ENC 1.14" "RS485 ENC 2.11" "RS485 ENC 2.14" CPU.A2 CPU.A4 CPU.A5 CPU.A6 CPU.A7 CPU.A8 CPU.A9 CPU.A10 CPU.A11 CPU.A12 CPU.A13 CPU.A14 CPU.A15 CPU.A16 CPU.A17 CPU.A19 CPU.A20 CPU.A23 CPU.AA1 CPU.AA2 CPU.AA3 CPU.AA5 CPU.AA7 CPU.AA8 CPU.AA12 CPU.AA14 CPU.AA15 CPU.AA21 CPU.AA23 CPU.AA24 CPU.AA25 CPU.AB1 CPU.AB2 CPU.AB4 CPU.AB6 CPU.AB10 CPU.AB12 CPU.AB14 CPU.AB16 CPU.AB24 CPU.AB25 CPU.AC1 CPU.AC2 CPU.AC5 CPU.AC6 CPU.AC9 CPU.AC11 CPU.AC13 CPU.AC15 CPU.AC20 CPU.AC21 CPU.AC24 CPU.AC25 CPU.AD2 CPU.AD3 CPU.AD4 CPU.AD5 CPU.AD6 CPU.AD7 CPU.AD8 CPU.AD10 CPU.AD11 CPU.AD13 CPU.AD14 CPU.AD15 CPU.AD18 CPU.AD21 CPU.AE2 CPU.AE3 CPU.AE4 CPU.AE5 CPU.AE6 CPU.AE7 CPU.AE9 CPU.AE10 CPU.AE11 CPU.AE13 CPU.AE14 CPU.AE15 CPU.AE18 CPU.AE22 CPU.B1 CPU.B3 CPU.B4 CPU.B5 CPU.B6 CPU.B7 CPU.B8 CPU.B9 CPU.B10 CPU.B11 CPU.B12 CPU.B13 CPU.B14 CPU.B15 CPU.B16 CPU.B17 CPU.B18 CPU.B19 CPU.B20 CPU.B23 CPU.B24 CPU.C1 CPU.C5 CPU.C6 CPU.C9 CPU.C11 CPU.C13 CPU.C15 CPU.C17 CPU.C20 CPU.C24 CPU.C25 CPU.D1 CPU.D4 CPU.D6 CPU.D9 CPU.D10 CPU.D12 CPU.D14 CPU.D16 CPU.D17 CPU.D20 CPU.D24 CPU.D25 CPU.E5 CPU.E7 CPU.E8 CPU.E12 CPU.E14 CPU.E15 CPU.E18 CPU.E19 CPU.E23 CPU.E24 CPU.E25 CPU.F6 CPU.F18 CPU.F23 CPU.F24 CPU.F25 CPU.G21 CPU.G24 CPU.G25 CPU.H21 CPU.H24 CPU.H25 CPU.J8 CPU.J22 CPU.J23 CPU.J24 CPU.J25 CPU.K22 CPU.K24 CPU.K25 CPU.L21 CPU.L23 CPU.L24 CPU.L25 CPU.M21 CPU.M22 CPU.M24 CPU.M25 CPU.N20 CPU.N23 CPU.N24 CPU.N25 CPU.P21 CPU.P22 CPU.P24 CPU.P25 CPU.R21 CPU.R23 CPU.R24 CPU.R25 CPU.T2 CPU.T22 CPU.T24 CPU.T25 CPU.U4 CPU.U22 CPU.U23 CPU.U24 CPU.U25 CPU.V20 CPU.V21 CPU.V24 CPU.V25 CPU.W21 CPU.W24 CPU.W25 CPU.Y3 CPU.Y4 CPU.Y6 CPU.Y8 CPU.Y15 CPU.Y20 CPU.Y22 CPU.Y23 CPU.Y24 CPU.Y25 ESD. EthernetPHY2.12 IGBT. IGBT.B IGBT.EW IGBT.GB IGBT.T1 IGBT.T2 PMIC.8 PMIC.9 PMIC.10 PMIC.11 PMIC.16 PMIC.19 PMIC.20 PMIC.28 PMIC.31 X.1

## Text inside footprints (layer, text, board x,y; h text height)
"C 1.8V Crystal": Top Overlay "C" at -3.852,40.602 h1 r90
"C ADC U-1": Top Overlay "C" at 1.8,89.963 h1 r90
"C ADC U-2": Top Overlay "C" at 3.2,89.963 h1 r90
"C ADC U-3": Top Overlay "C" at 4.6,89.963 h1 r90
"C ADC U-4": Top Overlay "C" at 0.4,89.963 h1 r90
"C ADC V-1": Top Overlay "C" at -3.8,89.963 h1 r90
"C ADC V-2": Top Overlay "C" at -2.4,89.963 h1 r90
"C ADC V-3": Top Overlay "C" at -1,89.963 h1 r90
"C ADC V-4": Top Overlay "C" at 11.6,89.963 h1 r90
"C ADC W-1": Top Overlay "C" at 13,89.963 h1 r90
"C ADC W-2": Top Overlay "C" at 14.4,89.963 h1 r90
"C ADC W-3": Top Overlay "C" at 10.2,89.963 h1 r90
"C ADC W-4": Top Overlay "C" at 6,89.963 h1 r90
"C Backup-1": Top Overlay "C" at -5.76,40.602 h1 r90
"C Backup-2": Top Overlay "C" at 7.4,89.963 h1 r90
"C Backup-3": Top Overlay "C" at 8.8,89.963 h1 r90
"C Backup-4": Top Overlay "C" at -5.2,89.963 h1 r90
"C Backup-5": Top Overlay "C" at -19.2,89.963 h1 r90
"C Backup-6": Top Overlay "C" at -17.8,89.963 h1 r90
"C CAP_SOC MCU": Top Overlay "C" at -19.8,47.963 h1 r90
"C CAP_SOC VDDS0": Top Overlay "C" at -21.2,47.963 h1 r90
"C CAP_SOC VDDS1": Top Overlay "C" at -17,47.963 h1 r90
"C CAP_SOC VDDS2": Top Overlay "C" at -18.4,47.963 h1 r90
"C CAP_SOC VDDS3": Top Overlay "C" at -25.4,47.963 h1 r90
"C CAP_SOC VDDS4": Top Overlay "C" at -26.8,47.963 h1 r90
"C CAP_SOC VDDS5": Top Overlay "C" at -22.6,47.963 h1 r90
"C CAP_SOC VDDS6": Top Overlay "C" at -24,47.963 h1 r90
"C CAP_SOC VDDS_CANUART": Top Overlay "C" at -15.6,47.963 h1 r90
"C ClockBuffer-1": Top Overlay "C" at -16.4,89.963 h1 r90
"C ClockBuffer-2": Top Overlay "C" at -20.6,89.963 h1 r90
"C DCDC I5V IN": Top Overlay "C" at 7.4,128.963 h1 r90
"C DCDC I5V OUT": Top Overlay "C" at 8.8,128.963 h1 r90
"C DCDC I9V IN": Top Overlay "C" at 6,128.963 h1 r90
"C DCDC I9V OUT": Top Overlay "C" at 3.2,128.963 h1 r90
"C DCDC I9V U IN": Top Overlay "C" at 4.6,128.963 h1 r90
"C DCDC I9V V IN": Top Overlay "C" at 15.8,128.963 h1 r90
"C DCDC I9V V OUT": Top Overlay "C" at 13,128.963 h1 r90
"C DCDC I9V W IN": Top Overlay "C" at 10.2,128.963 h1 r90
"C DCDC I9V W OUT": Top Overlay "C" at 11.6,128.963 h1 r90
"C DCDCI 9V U OUT": Top Overlay "C" at 14.4,128.963 h1 r90
"C Driver UH": Top Overlay "C" at -9.775,66.963 h1 r90
"C Driver UL": Top Overlay "C" at -8.375,66.963 h1 r90
"C Driver VH": Top Overlay "C" at -1.375,66.963 h1 r90
"C Driver VL": Top Overlay "C" at 0.025,66.963 h1 r90
"C Driver WH": Top Overlay "C" at -4.175,66.963 h1 r90
"C Driver WL": Top Overlay "C" at -2.775,66.963 h1 r90
"C DriverU-1": Top Overlay "C" at -24.8,89.963 h1 r90
"C DriverU-2": Top Overlay "C" at -23.4,89.963 h1 r90
"C DriverV-1": Top Overlay "C" at -22,89.963 h1 r90
"C DriverV-2": Top Overlay "C" at -9.4,89.963 h1 r90
"C DriverW-1": Top Overlay "C" at -8,89.963 h1 r90
"C DriverW-2": Top Overlay "C" at -6.6,89.963 h1 r90
"C ENC1 VCC1": Top Overlay "C" at -10.8,89.963 h1 r90
"C ENC1 VCC2-1": Top Overlay "C" at -15,89.963 h1 r90
"C ENC1 VCC2-2": Top Overlay "C" at -13.6,89.963 h1 r90
"C ENC2 VCC1": Top Overlay "C" at -12.2,89.963 h1 r90
"C ENC2 VCC2-1": Top Overlay "C" at 15.8,89.963 h1 r90
"C ENC2 VCC2-2": Top Overlay "C" at 42.4,89.963 h1 r90
"C EthernetPHY1-1": Top Overlay "C" at -6.793,74.963 h1 r90
"C EthernetPHY1-2": Top Overlay "C" at -8.193,74.963 h1 r90
"C EthernetPHY1-3": Top Overlay "C" at -9.593,74.963 h1 r90
"C EthernetPHY2-1": Top Overlay "C" at -2.593,74.963 h1 r90
"C EthernetPHY2-2": Top Overlay "C" at -3.993,74.963 h1 r90
"C EthernetPHY2-3": Top Overlay "C" at -5.393,74.963 h1 r90
"C LDO 3.3V-1 IN": Top Overlay "C" at -0.036,40.602 h1 r90
"C LDO 3.3V-1 OUT": Top Overlay "C" at 5.688,40.602 h1 r90
"C LDO 3.3V-2 IN": Top Overlay "C" at 43.8,89.963 h1 r90
"C LDO 3.3V-2 OUT": Top Overlay "C" at 45.2,89.963 h1 r90
"C LDO I9V U IN": Top Overlay "C" at 41,89.963 h1 r90
"C LDO I9V U OUT": Top Overlay "C" at 36.8,89.963 h1 r90
"C LDO I9V V IN": Top Overlay "C" at -21,108.963 h1 r90
"C LDO I9V V OUT": Top Overlay "C" at -22.4,108.963 h1 r90
"C LDO I9V W IN": Top Overlay "C" at -23.8,108.963 h1 r90
"C LDO I9V W OUT": Top Overlay "C" at -19.6,108.963 h1 r90
"C LDO PMIC IN": Top Overlay "C" at 3.78,40.602 h1 r90
"C LDO PMIC OUT": Top Overlay "C" at 1.872,40.602 h1 r90
"C MMC-1": Top Overlay "C" at 38.2,89.963 h1 r90
"C MMC-2": Top Overlay "C" at 39.6,89.963 h1 r90
"C PMIC 0.75V": Top Overlay "C" at 33.896,52.181 h1 r90
"C PMIC 1.1V": Top Overlay "C" at 35.804,52.181 h1 r90
"C PMIC 1.8V": Top Overlay "C" at -7.668,40.602 h1 r90
"C PMIC 1.8V*": Top Overlay "C" at -9.576,40.602 h1 r90
"C PMIC 2.5V": Top Overlay "C" at 37.712,52.181 h1 r90
"C PMIC InternalBypass": Top Overlay "C" at 39.62,52.181 h1 r90
"C PMIC SD_VDD": Top Overlay "C" at 20.244,40.602 h1 r90
"C PMIC VIN B1": Top Overlay "C" at 24.06,40.602 h1 r90
"C PMIC VIN B2": Top Overlay "C" at 22.152,40.602 h1 r90
"C PMIC VIN B3": Top Overlay "C" at 25.968,40.602 h1 r90
"C PMIC VIN LDO1": Top Overlay "C" at 29.784,40.602 h1 r90
"C PMIC VIN LDO34": Top Overlay "C" at 27.876,40.602 h1 r90
"C RJ451 RD1": Top Overlay "C" at -15.193,74.963 h1 r90
"C RJ451 RD2": Top Overlay "C" at -10.993,74.963 h1 r90
"C RJ451 TD1": Top Overlay "C" at -12.393,74.963 h1 r90
"C RJ451 TD2": Top Overlay "C" at -13.793,74.963 h1 r90
"C RJ452 RD1": Top Overlay "C" at -1.193,74.963 h1 r90
"C RJ452 RD2": Top Overlay "C" at 10.007,74.963 h1 r90
"C RJ452 TD1": Top Overlay "C" at 8.607,74.963 h1 r90
"C RJ452 TD2": Top Overlay "C" at 11.407,74.963 h1 r90
"D GateOFF UH": Top Overlay "<" at -23.6,66.156 h1 r90
"D GateOFF UL": Top Overlay "<" at -25.35,66.156 h1 r90
"D GateOFF VH": Top Overlay "<" at -16.6,66.156 h1 r90
"D GateOFF VL": Top Overlay "<" at -14.85,66.156 h1 r90
"D GateOFF WH": Top Overlay "<" at -20.1,66.156 h1 r90
"D GateOFF WL": Top Overlay "<" at -18.35,66.156 h1 r90
ESD: Mechanical 13 "*" at 37.095,41.421 h1.27
"EthernetPHY1 PWRDWN": Top Overlay "R" at 14.207,74.963 h1 r90
EthernetPHY2: Mechanical 13 "*" at -18.261,74.113 h1.27 r90
"EthernetPHY 1": Mechanical 13 "*" at 27.358,51.332 h1.27 r90
"F 1.8V Crystal": Top Overlay "F" at 11.812,40.602 h1 r90
"F ADC": Top Overlay "F" at 46.6,89.963 h1 r90
"F Driver": Top Overlay "F" at 48,89.963 h1 r90
"F ENC1 VCC1": Top Overlay "F" at 49.4,89.963 h1 r90
"F ENC1 VCC2": Top Overlay "F" at 50.8,89.963 h1 r90
"F ENC2 VCC1": Top Overlay "F" at 22.8,89.963 h1 r90
"F ENC2 VCC2": Top Overlay "F" at 24.2,89.963 h1 r90
"F EthernetPHY1": Top Overlay "F" at 25.6,89.963 h1 r90
"F EthernetPHY2": Top Overlay "F" at 21.4,89.963 h1 r90
"F EthernetPHY?": Top Overlay "F" at 17.2,89.963 h1 r90
"IGBTDriver U": Mechanical 13 "RefDes2" at -9.365,27.778 h1.27 r90; Mechanical 13 "*" at -13.899,26.266 h1.27 r90
"IGBTDriver V": Mechanical 13 "RefDes2" at 1.635,27.778 h1.27 r90; Mechanical 13 "*" at -2.899,26.266 h1.27 r90
"IGBTDriver W": Mechanical 13 "RefDes2" at 12.635,27.778 h1.27 r90; Mechanical 13 "*" at 8.101,26.266 h1.27 r90
"L PMIC Buck1": Top Overlay "I" at 16.228,40.769 h1 r90
"L PMIC Buck2": Top Overlay "I" at 13.92,40.769 h1 r90
"L PMIC Buck3": Top Overlay "I" at 7.796,40.769 h1 r90
"LED 12V": Top Overlay ">" at 18.336,40.686 h1 r90
"R 12V LED": Top Overlay "R" at 9.904,40.602 h1 r90
"R DDR0_CAL0": Top Overlay "R" at -7.2,47.963 h1 r90
"R DDR_RESET": Top Overlay "R" at -8.6,47.963 h1 r90
"R DDRZQ": Top Overlay "R" at -4.4,47.963 h1 r90
"R EthernetPHY1 LED Act": Top Overlay "R" at 12.807,74.963 h1 r90
"R EthernetPHY1 LED Link": Top Overlay "R" at 7.207,74.963 h1 r90
"R EthernetPHY2 LED Act": Top Overlay "R" at 1.607,74.963 h1 r90
"R EthernetPHY2 LED Link": Top Overlay "R" at 0.207,74.963 h1 r90
"R EthernetPHY2 PWRDN": Top Overlay "R" at 3.007,74.963 h1 r90
"R GATE PullDown UH": Top Overlay "R" at 4.225,66.963 h1 r90
"R GATE PullDown UL": Top Overlay "R" at 14.025,66.963 h1 r90
"R GATE PullDown VH": Top Overlay "R" at 15.425,66.963 h1 r90
"R GATE PullDown VL": Top Overlay "R" at 12.625,66.963 h1 r90
"R GATE PullDown WH": Top Overlay "R" at 9.825,66.963 h1 r90
"R GATE PullDown WL": Top Overlay "R" at 11.225,66.963 h1 r90
"R GateOFF UH": Top Overlay "R" at 19.625,66.963 h1 r90
"R GateOFF UL": Top Overlay "R" at 21.025,66.963 h1 r90
"R GateOFF VH": Top Overlay "R" at 16.825,66.963 h1 r90
"R GateOFF VL": Top Overlay "R" at 18.225,66.963 h1 r90
"R GateOFF WH": Top Overlay "R" at 25.225,66.963 h1 r90
"R GateOFF WL": Top Overlay "R" at 26.625,66.963 h1 r90
"R GateON UH": Top Overlay "R" at 23.825,66.963 h1 r90
"R GateON UL": Top Overlay "R" at 22.425,66.963 h1 r90
"R GateON VH": Top Overlay "R" at 7.025,66.963 h1 r90
"R GateON VL": Top Overlay "R" at 8.425,66.963 h1 r90
"R GateON WH": Top Overlay "R" at 5.625,66.963 h1 r90
"R GateON WL": Top Overlay "R" at 2.825,66.963 h1 r90
"R MCU_PORZ": Top Overlay "R" at -5.8,47.963 h1 r90
"R MCU_RESETZ": Top Overlay "R" at -12.8,47.963 h1 r90
"R MMC PULLUP CLK": Top Overlay "R" at 32.6,89.963 h1 r90
"R MMC PULLUP CMD": Top Overlay "R" at 34,89.963 h1 r90
"R MMC PULLUP D0": Top Overlay "R" at 35.4,89.963 h1 r90
"R MMC PULLUP D1": Top Overlay "R" at 31.2,89.963 h1 r90
"R MMC PULLUP D2": Top Overlay "R" at 27,89.963 h1 r90
"R MMC PULLUP D3": Top Overlay "R" at 28.4,89.963 h1 r90
"R PMIC Enable Pullup": Top Overlay "R" at 29.8,89.963 h1 r90
"R PORZ_OUT": Top Overlay "R" at -14.2,47.963 h1 r90
"R RBIAS EthernetPHY1": Top Overlay "R" at 5.807,74.963 h1 r90
"R RBIAS EthernetPHY2": Top Overlay "R" at 4.407,74.963 h1 r90
"R RESET_REQZ": Top Overlay "R" at -10,47.963 h1 r90
"R RESETSTATZ": Top Overlay "R" at -11.4,47.963 h1 r90
"RS485 ENC 1": Mechanical 13 "*" at 5.571,52.241 h1.27; Mechanical 13 "RefDes2" at 7.082,47.707 h1.27
"RS485 ENC 2": Mechanical 13 "*" at 38.101,26.266 h1.27 r90; Mechanical 13 "RefDes2" at 42.635,27.778 h1.27 r90